# Altium PCB 1.PcbDoc (part 2 of 2)
Units mil, origin at the board's own origin, x right, y up, seen from the top; angles counter-clockwise.
Board outline 7086.61 x 1988.19 mil, 2 copper layers (Top Layer, Bottom Layer); 115 components, 0 nets, 642 pads, 224 vias.
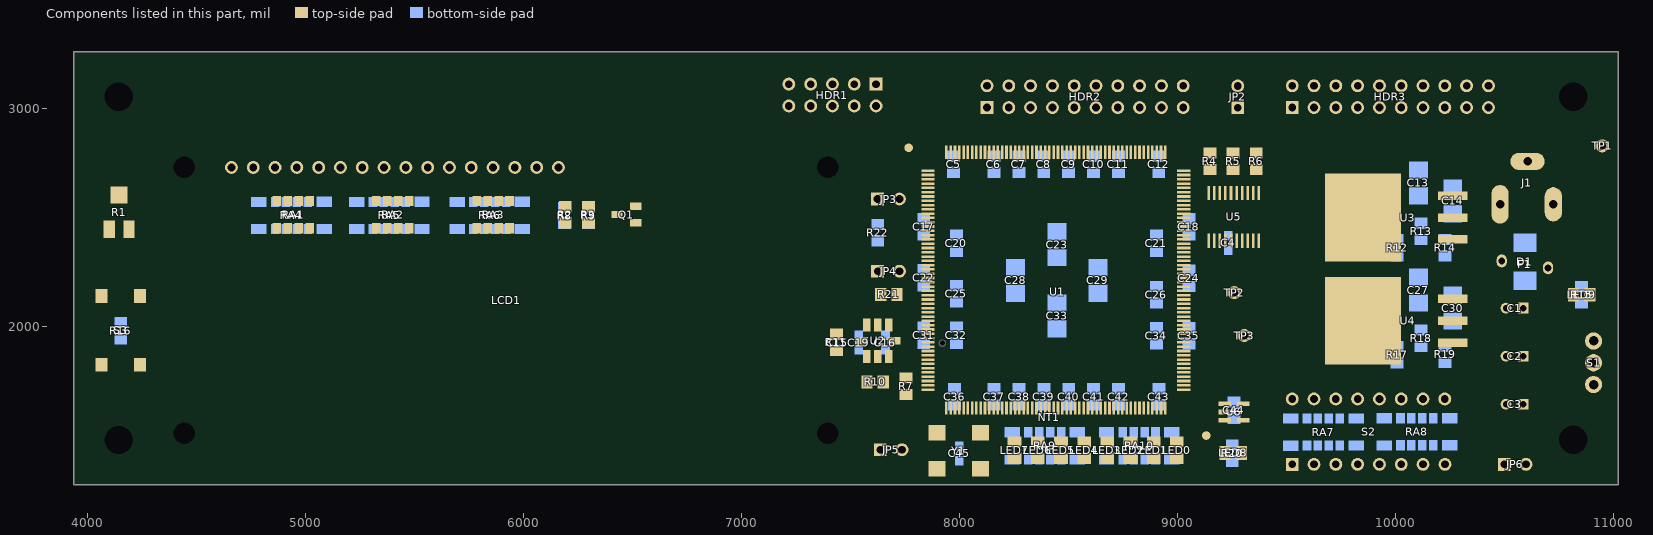
[diagram p2: the components of this part, seen from the top]

## Via types
v1: diameter 35.43, hole 23.62, Top Layer to Bottom Layer, tented both sides, 166 vias
v2: diameter 59.06, hole 31.5, Top Layer to Bottom Layer, tented both sides, 26 vias
v3: diameter 47.24, hole 31.5, Top Layer to Bottom Layer, 18 vias
v4: diameter 47.24, hole 31.5, Top Layer to Bottom Layer, tented both sides, 11 vias
v5: diameter 19.68, hole 11.81, Top Layer to Bottom Layer, tented both sides, 2 vias
v6: diameter 35.43, hole 23.62, Top Layer to Bottom Layer, 1 vias

## Nets (pads, with @x,y where several pads share a name; then routed paths per layer and width w, separated by ;. In a path a pad name is that pad's centre, name@x,y a point inside that pad or via, vN(x,y) a via of type N, cw(c..) or ccw(c..) an arc to the next point about the centre after c; other vN are vias at no path point) (continued)
copper on no net: | length 199543.1
  Top Layer w7.87: v1(4066.93,2208.78) 4128.54,2270.39 5685.04,2270.39 5732.87,2222.56 6655.51,2222.56 6759.84,2326.89 7736.22,2326.89 7799.21,2263.9 7799.21,2209.76 7807.09,2201.89 7856.3,2201.89 ; 4919.88,2449.93 4919.88,2363.69 4949.79,2333.78 5271.65,2333.78 5318.9,2286.54 5692.91,2286.54 5740.16,2239.29 6649.88,2239.29 6753.22,2342.64 7745.08,2342.64 7807.09,2280.63 7856.3,2280.63 ; 4969.88,2449.93 4969.88,2372.76 4993.11,2349.53 5279.53,2349.53 5326.77,2302.28 5700.79,2302.28 5748.03,2255.04 6643.35,2255.04 6746.7,2358.39 7751.72,2358.39 7809.79,2300.32 7856.3,2300.32 ; 5019.88,2449.93 5019.88,2377.87 5032.48,2365.28 5287.4,2365.28 5334.65,2318.03 5708.66,2318.03 5755.91,2270.79 6636.83,2270.79 6740.18,2374.13 7758.24,2374.13 7812.37,2320 7856.3,2320 ; 5326.57,2449.93 5326.57,2366.26 5359.06,2333.78 5720.47,2333.78 5767.72,2286.54 6630.31,2286.54 6733.65,2389.88 7764.76,2389.88 7814.96,2339.68 7856.3,2339.68 ; 5376.57,2449.93 5376.57,2371.57 5398.62,2349.53 5728.35,2349.53 5775.59,2302.28 6623.78,2302.28 6727.13,2405.63 7771.29,2405.63 7797.86,2379.06 7856.3,2379.06 ; 5426.57,2449.93 5426.57,2380.63 5441.93,2365.28 5736.22,2365.28 5783.46,2318.03 6617.26,2318.03 6720.61,2421.38 7777.81,2421.38 7800.45,2398.74 7856.3,2398.74 ; 5476.57,2449.93 5476.57,2389.69 5485.24,2381.02 5744.09,2381.02 5791.34,2333.78 6610.74,2333.78 6714.08,2437.13 7784.33,2437.13 7803.03,2418.43 7856.3,2418.43 ; 5787.2,2449.93 5787.2,2378.27 5815.94,2349.53 6604.21,2349.53 6707.56,2452.87 7790.86,2452.87 7805.62,2438.11 7856.3,2438.11 ; 5837.2,2449.93 5837.2,2383.39 5855.31,2365.28 6597.69,2365.28 6701.04,2468.62 7763.66,2468.62 7811.89,2516.85 7856.3,2516.85 ; 5887.2,2449.93 5887.2,2392.44 5898.62,2381.02 6591.17,2381.02 6694.52,2484.37 7755.91,2484.37 7808.07,2536.54 7856.3,2536.54 ; 5937.2,2449.93 5937.2,2406.42 5946.85,2396.77 6584.65,2396.77 6687.99,2500.12 7748.03,2500.12 7804.13,2556.22 7856.3,2556.22 ; 6192.91,2549.33 6156.5,2549.33 6145.67,2538.5 6145.67,2442.05 6175.2,2412.52 6578.12,2412.52 6681.47,2515.87 7740.16,2515.87 7800.2,2575.91 7856.3,2575.91 ; 7318.11,3010.35 7375.6,2952.87 7416.34,2952.87 7773.62,2595.59 7856.3,2595.59 ; 7318.11,3110.35 7368.11,3060.35 7368.11,2999.13 7398.63,2968.62 7424.22,2968.62 7777.56,2615.28 7856.3,2615.28 ; 7418.11,3010.35 7418.11,2997.36 7780.51,2634.96 7856.3,2634.96 ; 7418.11,3110.35 7468.5,3059.96 7468.5,2970.59 7784.45,2654.65 7856.3,2654.65 ; 7436.22,1964.68 7476.38,1964.68 7507.87,1933.19 7551.18,1933.19 ; 7518.11,3010.35 7518.11,2945 7769.09,2694.02 7856.3,2694.02 ; v1(7555.12,2059.17) 7566.93,2059.17 7575.98,2050.12 7575.98,2006.02 ; 7576.77,1744.21 7576.77,1789.49 7594.49,1807.2 7609.45,1807.2 7625.98,1823.74 7625.98,1860.35 ; 7625.72,2252.48 7625.72,2159.17 7639.56,2145.34 ; 7625.89,2006.52 7626.08,2006.71 v1(7626.08,2058.68) ; 7629.66,2189.09 7744.09,2189.09 7765.08,2168.11 7765.08,2152.36 7794.29,2123.15 7856.3,2123.15 ; v5(7637.8,1578.86) 7712.6,1578.86 7755.46,1621.72 7755.46,1687.33 7794.5,1687.33 7816.93,1709.76 7856.3,1709.76 ; 7675.98,2006.02 7675.98,2042.24 7675.98,2054.06 7681.1,2059.17 v1(7704.72,2059.17) ; v1(7685.04,2295.39) 7744.09,2295.39 7780.82,2258.66 7780.82,2160.24 7798.23,2142.83 7856.3,2142.83 ; 7700.79,1933.19 7736.22,1933.19 7744.09,1941.06 7744.09,1964.68 7779.51,2000.1 7779.51,2109.81 7743.99,2145.34 7714.36,2145.34 ; 7960.63,2798.35 v1(7960.63,3000.12) ; 8127.56,3102.48 8183.07,3046.97 8183.07,2985.35 8212.28,2956.15 8251.62,2956.15 8275.59,2932.18 8275.59,2798.35 ; 8227.56,3002.48 8305.12,2924.92 v1(8305.12,2882.99) 8314.96,2871.18 8314.96,2798.35 ; 8227.56,3102.48 8277.56,3052.48 8277.56,2976.67 8334.65,2919.58 8334.65,2798.35 ; 8253.94,1394.8 8253.94,1344.61 8263.78,1334.76 v1(8287.4,1334.76) ; 8253.94,1469.61 8253.94,1522.76 8285.43,1554.25 8541.71,1554.25 8562.37,1574.92 8758.86,1574.92 8767.72,1583.78 8767.72,1625.12 ; 8327.56,3002.48 8327.56,2948.94 8364.17,2912.32 v1(8364.17,2881.02) 8354.33,2871.18 8354.33,2798.35 ; 8327.56,3102.48 8369.09,3060.95 8369.09,2974.89 8403.91,2940.08 8445.42,2940.08 8472.44,2913.06 8472.44,2798.35 ; 8360.24,1394.8 8360.24,1336.73 v1(8362.2,1334.76) ; 8360.24,1469.61 8360.24,1510.94 8387.8,1538.5 8548.23,1538.5 8568.9,1559.17 8775.59,1559.17 8787.4,1570.98 8787.4,1625.12 ; 8427.56,3002.48 8511.81,2918.23 8511.81,2798.35 ; 8427.56,3102.48 8384.84,3059.76 8384.84,2981.42 8410.43,2955.83 8451.94,2955.83 8492.13,2915.64 8492.13,2798.35 ; v1(8437.01,1334.76) 8448.82,1334.76 8466.54,1352.48 8466.54,1394.8 ; 8466.54,1469.61 8466.54,1509.96 8478.35,1521.77 8557.09,1521.77 8578.74,1543.42 8800.2,1543.42 8807.09,1550.31 8807.09,1625.12 ; 8527.56,3002.48 8570.87,2959.17 8570.87,2798.35 ; 8527.56,3102.48 8476.38,3051.3 8476.38,2980.43 8531.5,2925.32 8531.5,2798.35 ; v1(8545.47,1334.76) 8561.02,1334.76 8572.83,1346.57 8572.83,1394.8 ; 8572.83,1469.61 8572.83,1507.99 8592.52,1527.68 8814.96,1527.68 8826.77,1539.49 8826.77,1625.12 ; 8590.55,2798.35 8590.55,2965.67 8576.77,2979.45 8576.77,3051.69 8627.56,3102.48 ; 8610.24,2798.35 8610.24,2940.08 8627.56,2957.4 8627.56,3002.48 ; 8629.92,2798.35 8629.92,2919.41 8675.2,2964.69 8675.2,3050.12 8727.56,3102.48 ; 8679.13,1394.8 8679.13,1344.61 8688.98,1334.76 v1(8716.54,1334.76) ; 8679.13,1469.61 8679.13,1503.07 8687.99,1511.93 8822.83,1511.93 8846.46,1535.55 8846.46,1625.12 ; 8708.66,2798.35 8708.66,2890.75 8727.56,2909.65 8727.56,3002.48 ; 8728.35,2798.35 8728.35,2888.16 8770.67,2930.49 8770.67,3045.59 8827.56,3102.48 ; 8748.03,2798.35 8748.03,2885.58 8827.56,2965.11 8827.56,3002.48 ; 8767.72,2798.35 8767.72,2882.99 8875.98,2991.26 8875.98,3050.91 8927.56,3102.48 ; 8785.43,1394.8 8785.43,1344.61 v1(8795.28,1334.76) ; 8785.43,1469.61 8825.79,1469.61 8838.58,1482.4 8838.58,1499.13 8866.14,1526.69 8866.14,1625.12 ; 8787.4,2798.35 8787.4,2880.04 8909.84,3002.48 8927.56,3002.48 ; 8807.09,2798.35 8807.09,2877.45 8889.8,2960.17 8947.25,2960.17 8989.57,3002.48 9027.56,3002.48 ; 8826.77,2798.35 8826.77,2874.87 8896.32,2944.42 9332.83,2944.42 9464.64,3076.23 9490.89,3102.48 9527.56,3102.48 ; 8846.46,2798.35 8846.46,2872.28 8902.85,2928.67 9339.35,2928.67 9470.84,3060.16 9585.24,3060.16 9627.56,3102.48 ; v1(8866.14,1334.76) 8881.89,1334.76 8891.73,1344.61 8891.73,1394.8 ; 8866.14,2798.35 8866.14,2869.7 8909.37,2912.92 9345.88,2912.92 9477.36,3044.41 9669.49,3044.41 9727.56,3102.48 ; 8885.83,1625.12 8885.83,1621.18 8885.83,1475.51 8891.73,1469.61 ; 8885.83,2798.35 8885.83,2867.11 8915.89,2897.18 9352.4,2897.18 9415.3,2960.08 9564.29,2960.08 9606.69,3002.48 9627.56,3002.48 ; 8905.51,1625.12 8905.51,1540.47 8949.8,1496.18 8949.8,1479.45 8959.65,1469.61 8998.03,1469.61 ; 8905.51,2798.35 8905.51,2844.61 v1(8927.17,2866.26) ; 8944.88,1625.12 8944.88,1586.73 8951.77,1579.84 9053.15,1579.84 v1(9079.72,1606.42) 9217.52,1606.42 ; 8944.88,2798.35 8944.88,2840.67 8983.27,2879.06 9376.97,2879.06 v1(9424.21,2926.3) ; v1(8948.82,1334.76) 8978.35,1334.76 8998.03,1354.45 8998.03,1394.8 ; 9029.53,1729.45 9083.66,1729.45 9103.35,1709.76 9150.59,1709.76 v1(9165.35,1724.53) ; 9029.53,1749.13 9114.17,1749.13 v1(9124.02,1739.29) ; 9029.53,1768.82 9378.94,1768.82 9481.5,1666.26 9527.56,1666.26 ; 9029.53,1788.5 9381.89,1788.5 9461.61,1708.78 9585.04,1708.78 9627.56,1666.26 ; 9029.53,1808.19 9384.84,1808.19 9468.5,1724.53 9669.29,1724.53 9727.56,1666.26 ; 9029.53,1827.87 9387.43,1827.87 9475.03,1740.28 9753.54,1740.28 9827.56,1666.26 ; 9029.53,1847.56 9390.01,1847.56 9427.04,1810.54 9481.55,1756.02 9837.8,1756.02 9927.56,1666.26 9926.38,1666.26 ; 9029.53,1867.24 9392.6,1867.24 9429.38,1830.47 9486.1,1773.74 9920.08,1773.74 10027.56,1666.26 ; 9029.53,1886.93 9395.19,1886.93 9492.63,1789.49 10004.33,1789.49 10127.56,1666.26 ; 9029.53,1906.61 9397.77,1906.61 9436.82,1867.57 9497.18,1807.2 10086.61,1807.2 10227.56,1666.26 ; 9029.53,2005.04 9416.34,2005.04 9625,2213.7 9625,2708.99 9662.19,2746.18 9842.06,2746.18 9866.66,2770.79 10119.09,2770.79 10287.04,2938.73 10363.81,2938.73 10427.56,3002.48 ; 9029.53,2024.72 9413.75,2024.72 9608.27,2219.24 9608.27,2714.53 9655.67,2761.93 9835.53,2761.93 9860.14,2786.54 10111.61,2786.54 10327.56,3002.48 ; 9029.53,2044.41 9411.17,2044.41 9592.52,2225.76 9592.52,2721.06 9649.14,2777.68 9829.01,2777.68 9854.6,2803.27 10106.08,2803.27 10279.53,2976.72 10279.53,3054.45 10327.56,3102.48 ; 9029.53,2064.09 9406.5,2064.09 9576.77,2234.37 9576.77,2727.58 9642.62,2793.43 9822.49,2793.43 9848.08,2819.02 10099.55,2819.02 10227.56,2947.02 10227.56,3002.48 ; 9029.53,2103.46 9097.44,2103.46 9121.06,2079.84 9398.62,2079.84 9561.02,2242.24 9561.02,2637.91 9561.02,2734.1 9636.1,2809.17 9815.96,2809.17 9841.55,2834.76 10093.03,2834.76 10177.17,2918.9 10177.17,3052.09 10227.56,3102.48 ; 9029.53,2123.15 9101.38,2123.15 9128.94,2095.59 9390.75,2095.59 9545.28,2250.12 9545.28,2656.61 9545.28,2740.62 9629.57,2824.92 9809.44,2824.92 9835.03,2850.51 10086.51,2850.51 10127.56,2891.56 10127.56,3002.48 ; 9029.53,2142.83 9105.32,2142.83 9136.81,2111.34 9382.87,2111.34 9529.53,2257.99 9529.53,2657.6 9529.53,2747.15 9623.05,2840.67 9802.92,2840.67 9828.51,2866.26 10052.17,2866.26 10075.79,2889.88 10075.79,3050.71 10127.56,3102.48 ; 9029.53,2182.2 9091.54,2182.2 9106.48,2197.15 9445.07,2197.15 9513.78,2265.87 9513.78,2665.47 9513.78,2753.67 9616.53,2856.42 9796.39,2856.42 9822.97,2882.99 9990.16,2882.99 10027.56,2920.39 10027.56,3002.48 ; 9029.53,2241.26 9084.65,2241.26 9109.25,2216.65 9440.94,2216.65 9498.03,2273.74 9498.03,2760.19 9610,2872.17 9789.87,2872.17 9816.45,2898.74 9947.83,2898.74 9977.36,2928.27 9977.36,3052.28 10027.56,3102.48 ; 9029.53,2260.94 9087.6,2260.94 9116.14,2232.4 9431.1,2232.4 9482.28,2283.58 9482.28,2642.83 9482.28,2766.72 9603.48,2887.91 9783.35,2887.91 9809.92,2914.49 9908.46,2914.49 9927.56,2933.58 9927.56,3002.48 ; 9029.53,2280.63 9090.18,2280.63 9122.66,2248.15 9421.26,2248.15 9466.54,2293.43 9466.54,2773.24 9596.96,2903.66 9776.83,2903.66 9803.4,2930.24 9848.43,2930.24 9878.94,2960.75 9878.94,3053.86 9927.56,3102.48 ; 9029.53,2300.32 9093.87,2300.32 9130.29,2263.9 9411.42,2263.9 9450.79,2303.27 9450.79,2779.76 9590.44,2919.41 9770.3,2919.41 9796.26,2945.37 9796.26,2945.98 9813.98,2945.98 9827.56,2959.57 9827.56,3002.48 ; 9029.53,2320 9096.46,2320 9136.81,2279.65 9401.57,2279.65 9435.04,2313.11 9435.04,2786.29 9583.91,2935.16 9763.78,2935.16 9780.51,2951.89 9780.51,3055.43 9827.56,3102.48 ; 9029.53,2359.37 9079.36,2359.37 9140.23,2298.5 9394.84,2298.5 9419.29,2322.95 9419.29,2792.81 9577.39,2950.91 9675.98,2950.91 9727.56,3002.48 ; 9029.53,2654.65 9104.33,2654.65 9110.24,2660.55 9367.13,2660.55 9374.02,2653.66 9374.02,2610.35 ; 9029.53,2694.02 9075.79,2694.02 9092.52,2677.28 9391.73,2677.28 9401.57,2667.44 9401.57,2578.86 9378.94,2556.22 9329.72,2556.22 9322.83,2563.11 9322.83,2610.35 ; v1(9094.49,2719.61) 9149.61,2719.61 ; v1(9125.98,2550.32) 9143.7,2568.03 9143.7,2610.35 ; v1(9156.5,2516.85) 9156.5,2532.6 9194.88,2570.98 9194.88,2610.35 ; v1(9200.79,2534.57) 9220.47,2554.25 9220.47,2610.35 ; v1(9204.84,2719.8) 9255.91,2719.61 ; 9218.5,1418.43 9218.5,1465.67 9259.84,1507.01 9259.84,1563.11 9265.75,1569.02 9302.17,1569.02 ; 9246.06,2610.35 9246.06,2561.9 9297.01,2510.96 v1(9297.01,2501.77) ; 9271.65,2610.35 9271.65,2569.02 9333.9,2506.77 v1(9347.01,2506.77) ; 9293.31,1418.42 v1(9353.35,1418.42) ; 9297.24,2391.85 v1(9297.24,2454.84) ; 9297.24,2610.35 9297.24,2566.06 9323.82,2539.49 9374.29,2539.49 v1(9387.01,2526.77) ; v1(9311.03,2719.59) 9362.2,2719.61
  Top Layer w11.81: v1(4188.98,2378.07) 4190.94,2380.04 4190.94,2445 ; 4241.73,1822.56 v1(4241.73,1895.39) ; 4241.73,2137.91 v1(4241.73,2207.2) ; 6299.21,2549.33 6344.49,2549.33 6358.27,2563.11 6459.65,2563.11 6473.43,2549.33 6515.75,2549.33 v1(6586.61,2549.33) 7551.18,2549.33 v4(7551.18,2763.9) ; 7651.57,1744.21 7651.57,1799.33 7675.98,1799.33 7675.98,1860.35 ; 7737.8,1433.19 7753.54,1417.44 v1(7897.64,1417.44) ; 7755.46,1762.13 7810.04,1762.13 7810.04,1748.66 7922.24,1748.66 ; v1(7775.59,1953.86) 7775.59,1965.2 7856.21,1965.2 ; v1(7800.2,2723.54) 7800.2,2713.7 7856.3,2713.7 ; 7856.21,1984.88 7907.95,1984.88 v1@7934.06,1958.78 ; 7856.21,2004.57 7905.04,2004.57 v1(7922.24,2021.77) ; 7856.21,2102.99 v1@7922.24,2102.99 ; 7856.21,2181.73 v1@7922.24,2181.73 ; 7856.21,2221.1 7919.8,2221.1 v1(7924.21,2225.51) v1@7929.13,2225.51 ; 7856.21,2240.79 7893.17,2240.79 7925.2,2272.81 v1(7925.2,2283.58) 8349.41,2283.58 v4(8349.41,2315.08) ; 7856.21,2358.9 7925.2,2358.9 v1(7925.2,2343.62) ; 7856.21,2457.32 7895.16,2457.32 7925.2,2427.28 v1(7925.2,2403.66) ; 7856.21,2477.01 v1@7930.12,2477.01 ; 7856.21,2496.69 7901.57,2496.69 7901.57,2541.46 v1(7926.18,2541.46) ; 7856.3,1729.45 7922.24,1729.45 v1(7922.24,1776.69) ; v1(7897.64,1578.86) 7933.07,1578.86 7940.86,1586.65 7940.86,1624.65 ; 7940.86,2797.87 7940.86,2755.13 7989.17,2706.81 v1(8035.43,2706.81) ; 7960.54,1626.96 7960.54,1775.71 v1(7976.38,1775.71) ; v1(8000,1323.94) 8022.64,1346.57 8097.64,1346.57 ; v1(8094.49,1713.7) 8177.08,1713.7 8177.08,1624.65 ; 8097.64,1511.93 8181.1,1511.93 8242.13,1572.95 8462.6,1572.95 8472.35,1582.71 8472.35,1624.65 ; v1(8098.43,2731.42) 8157.39,2731.42 8157.39,2797.87 ; v1(8159.45,1766.85) 8196.76,1729.54 8196.76,1624.65 ; v1(8159.45,2657.6) 8177.08,2675.23 8177.08,2797.87 ; 8196.76,2797.87 8196.76,2729.54 v1(8273.62,2652.68) ; 8216.45,1624.65 8216.45,1711.65 v1(8273.62,1768.82) ; 8295.19,2797.87 8295.19,2732.4 v1(8329.72,2732.4) ; 8314.87,1624.65 8314.87,1705.83 v1(8330.71,1705.83) ; 8373.93,2797.87 8373.93,2666.54 v1(8387.8,2652.68) ; v1(8387.8,1768.82) 8393.61,1763 8393.61,1624.65 ; 8393.61,2797.87 8393.61,2852.48 ; 8393.7,2852.48 8452.76,2852.48 ; 8413.3,2797.87 8413.3,2710.83 8426.18,2697.95 8490.16,2697.95 8500.98,2687.13 v1(8500.98,2657.6) ; 8432.98,1624.65 8432.98,1665.56 8413.39,1685.16 8413.39,1720.59 8459.65,1766.85 v1(8501.97,1766.85) ; 8432.98,2797.87 8432.98,2735.29 v1(8446.85,2735.29) ; v1(8445.87,1705.83) v1@8452.76,1705.83 ; 8452.67,1624.65 8452.67,1669.32 ; 8452.67,2797.87 8452.67,2852.48 ; v1@8551.09,2732.4 8551.09,2797.87 ; v1(8559.06,1705.83) v1@8570.87,1705.83 ; 8570.78,1624.65 v1@8570.78,1705.83 ; v1(8616.14,1768.82) 8669.2,1715.76 8669.2,1624.65 ; v1(8616.14,2652.68) 8649.52,2686.06 8649.52,2797.87 ; 8669.2,2797.87 8669.2,2718.71 v1(8730.31,2657.6) ; 8688.89,1624.65 8688.89,1726.41 v1(8729.33,1766.85) ; 8688.89,2797.87 8688.89,2732.4 v1(8791.34,2732.4) ; 8708.57,1624.65 8708.57,1696.97 v1(8798.23,1696.97) ; v1(8848.43,1696.97) 8848.43,1671.38 8925.11,1671.38 8925.11,1624.65 ; v1(8854.33,2732.4) 8925.2,2732.4 ; v1(8903.54,2056.22) 8903.54,2083.31 9029.44,2083.31 ; v1(8915.35,2655.63) 8973.43,2713.7 9029.53,2713.7 ; 8925.11,2732.4 8925.11,2797.87 ; v1(8964.57,2454.84) 8964.57,2457.32 9029.44,2457.32 ; v1(8965.55,1897.76) 8977.04,1909.25 8977.04,1951.8 8990.44,1965.2 9029.44,1965.2 ; v1@8965.55,1984.88 9029.44,1984.88 ; v1(8965.55,2146.77) 8980.83,2162.05 9029.44,2162.05 ; v1(8965.55,2195.98) v1@8971.46,2201.89 ; v1(8965.55,2245.2) 8989.65,2221.1 9029.44,2221.1 ; v6(8965.55,2339.21) 9029.44,2339.21 ; v1(8965.55,2399.72) 8980.31,2414.49 8980.31,2426.03 8991.93,2437.64 9029.44,2437.64 ; v1(8965.55,2500.12) 8988.66,2477.01 9029.44,2477.01 ; v1(8971.46,1748.15) 8971.46,1724.53 8986.69,1709.29 9029.44,1709.29 ; v1@8971.93,2201.42 9029.44,2201.42 ; 9027.56,3102.48 9277.56,3102.48 ; 9029.44,1945.51 v1@9122.05,1945.51 ; v1(9072.83,1325.91) 9082.68,1314.09 9422.24,1314.09 9474.41,1366.26 10600,1366.26 ; 9143.7,2391.85 9143.7,2477.48 ; 9143.7,2462.72 v1(9233.27,2462.72) ; v1(9149.59,1573.94) 9149.61,1569.02 9217.52,1569.02 ; 9149.61,2794.41 9149.61,2840.67 ; 9255.91,2794.41 9255.91,2840.67 ; 9302.17,1643.82 9410.43,1643.82 v1(9418.31,1651.69) ; 9322.83,2391.85 v1(9322.83,2331.81) 9366.14,2331.81 9374.02,2339.69 9374.02,2391.85 ; 9348.42,2331.81 9348.42,2391.85 ; v1(9361.22,1500.12) 9451.77,1590.67 v1(10413.39,1590.67) ; 9362.2,2794.41 9362.2,2849.53 9363.19,2850.51 ; v1(9394.69,1354.45) 9421.18,1380.94 9421.18,1411.84 9512.41,1503.07 v1(9595.87,1503.06) ; v3(9488.19,1882.01) v3(9606.3,1882.01) ; v3(9547.24,1862.32) v3@9547.24,1882.01 ; v1(10212.6,2748.15) 10212.6,2787.52 10495.08,2787.52 10495.08,2756.02 10566.93,2756.02 10566.93,2748.15 ; v3(10251.97,2846.57) v3(10429.13,2846.57) ; v1(10307.09,1862.32) 10507.87,1862.32 ; v1(10338.58,2224.53) 10419.29,2143.82 10816.93,2143.82 10726.38,2143.82 ; 10507.87,2098.54 10507.87,2143.82 ; 10566.93,2817.23 10566.93,2681.22 10645.67,2681.22 10645.67,2817.23 ; 10606.3,2681.22 10606.3,2560.16 10649.61,2560.16 ; 10791.34,2519.8 10649.61,2519.8 10649.61,2598.54 10791.34,2598.54
  Top Layer w19.68: 4064.96,1822.56 4064.96,1891.85 v1(4066.93,1893.82) ; 4064.96,2137.91 v1@4064.96,2206.81 ; 4145.67,2602.48 4255.91,2602.48 4299.21,2559.17 4728.87,2559.17 4861.42,2691.72 4861.42,2728.46 ; v1(4208.66,2017.83) 4352.36,2017.83 4480.31,1889.88 v1(7291.32,1889.88) 7436.22,1889.88 ; 4919.88,2573.93 4919.88,2641.46 4961.42,2682.99 4961.42,2728.46 ; 4969.88,2573.93 4969.88,2636.93 5061.42,2728.46 ; 5019.88,2573.93 5019.88,2642.05 5059.06,2681.22 5114.17,2681.22 5161.42,2728.46 ; 5261.42,2728.46 5326.57,2663.31 5326.57,2573.93 ; 5361.42,2728.46 5361.42,2657.6 5376.57,2642.44 5376.57,2573.93 ; 5426.57,2573.93 5426.57,2642.83 5461.42,2677.68 5461.42,2728.46 ; 5476.57,2573.93 5476.57,2643.62 5561.42,2728.46 ; 5661.42,2728.46 5677.17,2728.46 5720.34,2685.29 5740.03,2685.29 5787.2,2638.11 5787.2,2573.93 ; 5761.42,2728.46 5837.2,2652.68 5837.2,2573.93 ; 5861.42,2728.46 5887.2,2702.68 5887.2,2573.93 ; 5937.2,2573.93 5937.2,2704.25 5961.42,2728.46 ; v1(6088.58,1695) v1(7469.49,1695) ; 6192.91,2474.53 6515.75,2474.53 ; v1(6370.08,2511.93) 6429.13,2511.93 ; 7897.64,1334.76 v1(7897.64,1578.86) ; v1(7924.21,2225.51) v1(8139.76,2225.51) ; v1(7930.12,2477.48) 7979.33,2428.27 v1(8139.76,2428.27) ; v1@7934.06,1958.78 v1(8139.76,1958.78) ; v1(8035.43,2706.81) 8084.65,2657.6 v1(8159.45,2657.6) v1(8159.45,2527.68) ; v1(8046.26,1694.02) 8046.26,1769.8 v1(8173.23,1896.77) ; v1(8159.45,1766.85) 8245.08,1852.48 v1(8245.08,1896.77) ; v1(8500.98,2527.68) v1(8500.98,2657.6) ; v1(8501.97,1766.85) v1(8501.97,1896.77) ; v1(8636.81,1896.77) 8636.81,1859.37 v1(8729.33,1766.85) ; v1(8673.23,2527.68) 8673.23,2600.51 v1(8730.31,2657.6) ; v1(8746.06,1911.54) 8808.07,1911.54 v1(8971.46,1748.15) ; v1(8746.06,1983.39) 8879.92,1983.39 v1(8965.55,1897.76) ; v1(8746.06,2195.98) v1(8965.55,2195.98) ; v1(8746.06,2454.84) v1(8964.57,2454.84) ; 8827.76,2527.68 8827.76,2568.03 v1(8915.35,2655.63) ; v1(9106.3,2847.56) 9116.14,2840.67 9352.36,2840.67 ; v1(9595.87,1503.06) v1@10175,1503.06 ; v1@10170.08,2398.54 10263.78,2398.54 ; v1(10171.26,1907.6) 10188.98,1925.32 10263.78,1925.32 ; v1(10173.23,1500.12) 10177.17,1504.06 v1(10452.76,1504.06) ; v1(10374.02,1712.72) 10562.99,1712.72 10586.61,1689.09 10586.61,1641.85 ; v1(10452.76,1945) 10566.93,1945 10586.61,1925.32 10586.61,1862.32 ; v1(10527.56,2842.64) 10531.5,2846.57 10937.01,2846.57 10956.69,2826.89 ; 10586.61,2019.8 10586.61,2082.8 ; v1(10854.33,2248.15) 10891.73,2210.75 10891.73,2143.82
  Top Layer w39.37: 4100.39,2445 4100.39,2509.96 4118.11,2527.68 4259.84,2527.68 4283.46,2504.06 v1(6088.58,2504.06) ; v1(4188.98,2378.07) v1(4622.05,2378.07) ; v2(4724.41,1507.99) v2(7086.61,1507.99) ; v2@4724.41,3198.94 v2@7217.52,3198.94 ; v2(7217.52,3193.03) v4(10472.44,3193.03) ; 7902.56,3193.23 7902.56,2744.21 v1(8003.94,2642.83) 8003.94,2476.5 8349.41,2476.5 v4(8349.41,2315.08) ; v1(8746.06,2527.68) v1(8906.5,2527.68) ; v1(8820.87,1829.84) 8824.8,1821.97 8980.54,1666.23 9126.75,1666.23 v5(9136.81,1676.3) ; v1(9106.3,2847.56) v1(9421.26,2847.56) ; v1(10118.11,2036.54) 10129.33,2025.32 10352.76,2025.32 v1(10374.02,2004.06) ; v1(10165.35,2527.68) 10194.49,2498.54 10355.91,2498.54 10393.7,2460.75 10393.7,2252.09 v1(10439.96,2205.83) ; v1(10173.23,2125.12) 10350.39,2126.1 10413.39,2063.11 v1(10413.39,2040.47) 10434.06,2019.8 v1(10814.96,2019.8) 10814.96,1854.45 10837.01,1832.4 10909.45,1832.4 ; v1(10177.17,2598.54) v1(10387.8,2598.54) ; 10700.79,2267.83 10751.97,2319.01 10893.7,2319.02 v1(10937.01,2275.71)
  Top Layer w47.24: v4(8064.96,2342.64) v4(8257.87,2342.64) ; v4(8635.83,2342.64) v4(8820.87,2342.64)
  Bottom Layer w7.87: 7440.94,1958.78 7471.65,1958.78 v1(7492.13,1948.94) ; 7518.11,3010.35 7474.41,3054.06 7474.41,3132.01 7535.63,3193.23 9098.23,3193.23 9224.41,3067.05 9224.41,2941.06 9402.56,2762.91 9402.56,2587.32 9347.01,2531.77 v1(9347.01,2506.77) ; 7518.11,3110.35 7518.11,3140.28 7555.12,3177.28 9091.9,3177.28 9208.66,3060.52 9208.66,2934.17 ; 7539.37,1958.78 7539.37,1995.85 7555.12,2011.6 v1(7555.12,2059.17) ; 7618.11,3010.35 7566.91,3061.55 7566.91,3145.77 7582.68,3161.54 7681.1,3161.54 7914.37,2928.27 9192.3,2928.27 9241.04,2879.52 9371.06,2749.5 9371.06,2620.83 9267.33,2517.09 9267.33,2484.76 v1(9297.24,2454.84) ; 7618.11,3110.35 7704.72,3110.35 7902.56,2912.52 8880.91,2912.52 v1(8927.17,2866.26) ; 7625.72,2583.19 7625.72,2467.57 7626.43,2466.86 7671.06,2466.86 7685.04,2452.87 v1(7685.04,2295.39) ; v1(7626.08,2058.68) 7626.08,2030.84 7661.42,1995.51 7661.42,1958.78 ; 7626.43,2392.05 7573.02,2392.05 7551.18,2366.28 7551.18,2177.28 7594.49,2133.98 7658.04,2133.98 7704.72,2087.29 v1(7704.72,2059.17) v1@7692.91,2070.98 ; 7637.8,1433.19 v5(7637.8,1578.86) ; 7725.72,2252.48 7725.72,2517.18 7767.72,2559.17 7767.72,2606.42 7741.47,2632.66 7741.47,2756.72 7865.77,2881.02 8249.99,2881.02 8277.55,2853.46 8336.61,2853.46 v1(8364.17,2881.02) ; 7725.72,2583.19 7725.72,2763.24 7859.25,2896.77 8291.34,2896.77 v1(8305.12,2882.99) ; v1(7960.63,3000.12) 7960.63,3177.28 ; v1(8287.4,1334.76) 8307.09,1334.76 8316.73,1344.41 8316.73,1389.89 ; v1(8362.2,1334.76) 8366.73,1339.29 8366.73,1389.89 ; 8416.73,1389.89 8416.73,1355.04 v1(8437.01,1334.76) ; 8466.73,1389.89 8466.73,1358.39 8490.35,1334.76 v1(8545.47,1334.76) ; v1(8716.54,1334.76) 8736.22,1334.76 8749.8,1348.35 8749.8,1389.89 ; v1(8795.28,1334.76) 8799.8,1339.29 8799.8,1389.89 ; 8849.8,1389.89 8849.8,1351.1 v1(8866.14,1334.76) ; 8899.8,1389.89 8899.8,1355.43 8920.47,1334.76 ; v1(9079.72,1606.42) 9079.72,1747.17 9151.57,1819.02 9151.57,2097.2 9140.75,2108.03 9140.75,2478.03 9125.98,2492.8 9125.98,2688.11 v1(9094.49,2719.61) ; v1(9124.02,1739.29) 9167.32,1782.6 9167.32,2103.73 9156.5,2114.55 9156.5,2671.45 v1(9204.84,2719.8) ; v1(9165.35,1724.53) 9165.35,1758.36 9183.07,1776.08 9183.07,2110.25 9172.24,2121.08 9172.24,2487.01 9200.79,2515.55 9200.79,2565.08 9311.03,2675.33 v1(9311.03,2719.59) ; 9208.66,2934.54 9217.52,2925.68 9217.52,2925.31 9386.81,2756.02 9386.81,2601.57 9297.01,2511.77 v1(9297.01,2501.77) ; 9251.97,1455.83 9315.95,1455.83 v1(9353.35,1418.42) ; v1(9387.01,2526.77) 9418.31,2558.07 9418.31,2770.39 9358.27,2830.43 9358.27,2887.91 9396.65,2926.3 v1(9424.21,2926.3) ; 8920.47,1334.76 v1(8948.82,1334.76) 8920.47,1334.76
  Bottom Layer w11.81: v1(4188.98,2378.07) 4241.73,2378.07 v1(4241.73,1895.39) ; 4622.05,2728.46 4661.42,2728.46 ; v2(4724.41,1507.99) 4724.41,2378.07 ; v2@4724.41,3198.94 4622.05,3198.94 v1(4622.05,2378.07) 5618.1,2378.07 v1(5618.1,2413.5) ; 5161.42,2378.07 v1(5161.42,2397.76) ; v2@6496.06,3212.7 6586.61,3212.7 v1(6586.61,2549.33) ; 7217.52,3110.94 v2@7217.52,3198.94 ; 7218.11,3010.35 7218.11,3110.35 ; v1(7291.32,1889.88) 7291.32,1816.06 7352.36,1755.04 7683.07,1755.04 7858.27,1578.86 8021.65,1578.86 8046.26,1603.46 v1(8046.26,1694.02) ; v1(7539.37,1799.32) 7539.37,1891.85 ; v4(7551.18,2763.9) 7551.18,2571.97 7374.02,2571.97 7374.02,1891.85 7661.42,1891.85 v1(7661.42,1799.33) v1@7662.5,1810.26 ; 7775.59,2103.46 v1(7922.24,2103.46) 7930.12,2111.34 7986.22,2111.34 ; 7775.59,2260.94 7836.61,2260.94 7925.2,2260.94 v1(7925.2,2283.58) ; 7775.59,2343.62 7986.22,2343.62 ; 7836.61,1997.17 7895.67,1997.17 v1(7922.24,1970.59) ; 7836.61,2186.14 7876.97,2186.14 7890.75,2199.92 7890.75,2215.67 7900.59,2225.51 v1(7924.21,2225.51) ; 7836.61,2418.43 7878.94,2418.43 7902.56,2442.05 7902.56,2449.92 v1(7930.12,2477.48) ; 7836.61,2541.46 v1(7926.18,2541.46) ; 7836.61,2704.84 7974.41,2704.84 ; v1(7922.24,2021.77) 7946.85,1997.17 7986.22,1997.17 ; v1(7922.24,2182.2) 7922.24,2186.14 7986.22,2186.14 ; v1(7925.2,2403.66) 7939.96,2418.43 7986.22,2418.43 ; 7974.41,2779.65 8022.64,2779.65 8035.43,2766.85 v1(8035.43,2706.81) ; 7978.35,1638.9 8046.26,1638.9 ; 7978.35,1713.7 7931.9,1713.7 7931.89,1767.05 v1(7922.24,1776.69) ; 7986.22,1922.36 7922.24,1922.36 ; v1(8000,1323.94) 8000,1383.98 8057.09,1383.98 8057.09,1442.05 9072.83,1442.05 v1(9072.83,1325.91) ; v1(8098.43,2731.42) 8098.43,2779.65 8159.45,2779.65 8159.45,2831.81 ; 8159.45,1601.5 8159.45,1638.9 ; 8159.45,1713.7 v1(8159.45,1766.85) ; v1(8159.45,2657.6) 8159.45,2704.84 ; 8257.87,2150.71 v4(8348.43,2150.71) 8348.43,2106.42 8541.34,2106.42 v4(8541.34,2150.71) 8635.83,2150.71 ; 8272.64,1601.5 8273.62,1602.48 8273.62,1638.9 8330.71,1638.9 v1(8330.71,1705.83) ; 8273.62,2831.81 8273.62,2779.65 8329.72,2779.65 v1(8329.72,2732.4) ; 8316.73,1513.89 8316.73,1601.3 ; v4(8349.41,2315.08) 8448.82,2315.08 ; 8366.73,1513.89 8366.73,1601.3 ; 8387.8,1601.5 8387.8,1638.9 ; 8387.8,2831.81 8387.8,2779.65 8446.85,2779.65 v1(8446.85,2735.29) ; 8416.73,1513.89 8416.73,1601.3 ; 8433.07,2831.81 v1(8433.07,2852.48) ; v1(8445.87,1705.83) 8445.87,1638.9 8501.97,1638.9 8501.97,1601.5 ; 8448.82,2106.42 8448.82,2315.08 ; 8466.73,1513.89 8466.73,1601.3 ; v1(8500.98,2657.6) 8501.97,2704.84 ; 8501.97,1713.7 v1(8501.97,1766.85) ; 8501.97,2779.65 8501.97,2831.81 ; v4(8543.31,2315.08) 8448.82,2315.08 ; v1(8559.06,1705.83) 8559.06,1638.9 8616.14,1638.9 8616.14,1601.5 ; v1(8560.04,2732.4) 8560.04,2779.65 8616.14,2779.65 8616.14,2831.81 ; v1(8729.33,1766.85) 8729.33,1714.68 8730.31,1713.7 ; 8730.31,1601.5 8730.31,1638.9 8798.23,1638.9 v1(8798.23,1696.97) ; v1(8730.31,2657.6) 8730.32,2704.84 ; 8749.8,1513.89 8749.8,1601.3 ; 8799.8,1513.89 8799.8,1601.3 ; v1(8848.43,1696.97) 8848.43,1638.9 8915.35,1638.9 8915.35,1601.5 ; 8849.8,1513.89 8849.8,1601.3 ; 8899.8,1513.89 8899.8,1601.3 ; 8903.54,1918.43 8941.79,1918.43 ; 8903.54,1993.23 8903.54,2107.4 ; v1(8903.54,2056.22) 9104.33,2056.22 ; 8903.54,2182.2 8917.32,2168.43 8943.9,2168.43 v1(8965.55,2146.77) ; 8903.54,2418.43 8943.9,2418.43 8962.6,2399.72 v1(8965.55,2399.72) ; 8903.82,2343.4 8947.73,2343.4 8951.92,2339.21 v6(8965.55,2339.21) ; 8915.35,1713.7 8959.65,1713.7 8971.46,1725.51 v1(8971.46,1748.15) ; v1(8915.35,2655.63) 8915.35,2713.7 ; 8915.35,2779.65 8854.33,2779.65 v1(8854.33,2732.4) v1(8791.34,2732.4) 8791.34,2779.65 8730.32,2779.65 8730.32,2831.81 7875.98,2831.81 7800.2,2756.02 v1(7800.2,2723.54) 7836.61,2723.54 7836.61,2493.23 7775.59,2493.23 7775.59,1922.36 7836.61,1922.36 7922.24,1922.36 ; 8941.37,1918.85 8945.27,1922.75 ; 8945.77,1922.26 8965.55,1942.05 v1(8965.55,1985.35) ; v1(8964.57,2454.84) 9000.98,2418.43 9053.15,2418.43 ; v1(8965.55,1897.76) 9003.94,1936.14 9003.94,1985.35 9011.81,1993.23 9053.15,1993.23 ; v1(8965.55,2195.98) 8979.33,2182.2 9053.15,2182.2 ; v1(8965.55,2245.2) 8977.36,2257.01 9053.15,2257.01 9104.33,2257.01 ; v6@8965.55,2339.68 9104.33,2339.68 ; v1(8965.55,2500.12) 8972.44,2493.23 9053.15,2493.23 9104.33,2493.23 9104.33,1967.64 9122.05,1949.92 9122.05,1853.46 9031.5,1853.46 9031.5,1563.11 9149.61,1563.11 v1(9149.59,1573.94) 9162.4,1576.89 9259.84,1576.89 ; 9031.5,1601.5 8094.49,1601.5 v1(8094.49,1713.7) 8094.49,1775.71 v1(7976.38,1775.71) v1(7922.24,1776.69) ; 9053.15,1918.43 9122.05,1918.43 ; v4(9196.83,3193.03) 9277.56,3193.03 9277.56,3002.48 ; 9233.27,2348.54 9306.1,2348.54 v1(9322.83,2331.81) ; 9233.27,2415.47 v1(9233.27,2462.72) ; 9251.97,1381.02 9308.07,1381.02 9334.63,1354.45 v1(9394.69,1354.45) 9418.31,1378.07 v1(9418.31,1651.69) 9259.84,1651.69 ; v3(9488.19,1882.01) v3(9488.19,2000.12) ; v3(9547.24,1862.32) v3(9547.24,2039.49) ; v3(9606.3,1882.01) 9606.3,2224.53 10106.3,2224.53 10263.78,2224.53 ; 10106.3,2716.65 10212.6,2716.65 v1(10212.6,2748.15) 10263.78,2748.15 10263.78,2633.98 10338.58,2633.98 ; 10228.35,1907.6 10307.09,1907.6 v1(10307.09,1862.32) ; 10228.35,2397.76 10338.58,2397.76 ; 10263.78,2141.85 10263.78,2224.53 ; 10336.61,2633.98 10338.58,2633.98 ; v3(10399.61,2787.52) 10429.13,2787.52 v3(10429.13,2846.57) ; 10427.56,3102.48 10427.17,3193.03 10566.93,3193.03 10566.93,2689.09 10645.67,2689.09 10645.67,2819.02 ; 10594.49,2207.88 10507.87,2207.8 10507.87,1425.32 10600,1425.32 10600,1366.26 ; 10791.34,2519.8 10657.48,2519.8 10657.48,2598.54 10791.34,2598.54 ; v1(10814.96,2019.8) 10854.33,2063.11 10854.33,2106.42 ; v1(7922.24,1776.69) 7922.24,1922.36 ; 10263.78,2224.53 v1(10338.58,2224.53) 10338.58,2633.98
  Bottom Layer w19.68: v1(4066.93,1893.82) v1(4066.93,2208.78) ; 4066.93,1943.03 4153.54,1943.03 ; 4153.54,2017.83 v1(4208.66,2017.83) ; 4862.01,2445.99 v1(4862.2,2504.06) 5012.2,2504.06 ; 4912.01,2445.99 4912.01,2503.86 ; 4912.01,2569.99 4912.01,2618.03 4961.42,2667.44 4961.42,2728.46 ; 4962.01,2445.99 4962.01,2503.86 ; 4962.01,2569.99 4962.01,2629.06 5061.42,2728.46 ; 5012.01,2445.99 5012.01,2503.86 ; 5012.01,2569.99 5012.01,2626.3 5062.79,2677.08 5110.04,2677.08 5161.42,2728.46 ; 5261.42,2728.46 5310.83,2679.06 5310.83,2569.99 ; 5310.83,2445.99 v1(5311.02,2504.06) 5461.02,2504.06 ; 5360.83,2445.99 5360.83,2503.86 ; 5360.83,2569.99 5360.83,2727.87 5361.42,2728.46 ; 5410.83,2445.99 5410.83,2503.86 ; 5410.83,2569.99 5410.83,2677.87 5461.42,2728.46 ; 5460.83,2445.99 5460.83,2503.86 ; 5460.83,2569.99 5460.83,2630.24 5500,2669.41 5547.24,2669.41 5561.42,2683.58 5561.42,2728.46 ; 5661.42,2728.46 5771.46,2618.43 5771.46,2569.99 ; 5761.42,2728.46 5821.46,2668.43 5821.46,2569.99 ; 5771.46,2445.99 v1(5771.65,2504.06) 5921.65,2504.06 ; 5821.46,2445.99 5821.46,2503.86 ; 5861.42,2728.46 5861.42,2675.51 5871.46,2665.47 5871.46,2569.99 ; 5871.46,2445.99 5871.46,2503.86 ; 5921.46,2445.99 5921.46,2503.86 ; 5921.46,2569.99 5921.46,2688.5 5961.42,2728.46 ; 6061.42,2728.46 6088.58,2701.3 v1(6088.58,1695) ; 6161.42,2728.46 6161.42,2626.1 6188.98,2598.54 6188.98,2545.39 6299.21,2545.39 ; 6188.98,2470.59 6356.3,2470.59 6370.08,2484.37 v1(6370.08,2511.93) ; v1(7469.49,1695) 7647.64,1695 7826.77,1515.87 8072.83,1514.88 8119.09,1468.62 9039.37,1468.62 9086.61,1515.87 9345.47,1515.87 v1(9361.22,1500.12) ; v1(7897.64,1417.44) 7931.1,1450.91 8000,1450.91 ; 7986.22,1997.17 8064.96,1997.17 ; 7986.22,2186.14 8064.96,2186.14 ; 7986.22,2418.43 8064.96,2418.43 ; 8273.62,1713.7 v1(8273.62,1768.82) 8273.62,1821.97 ; 8273.62,2602.48 v1(8273.62,2652.68) 8273.62,2704.84 ; 8387.8,1713.7 8387.8,1821.97 ; 8387.8,2602.48 8387.8,2704.84 ; 8616.14,1713.7 8616.14,1821.97 ; 8616.14,2602.48 8616.14,2704.84 ; 8820.87,1918.43 8903.54,1918.43 ; 8820.87,2182.2 8903.54,2182.2 ; 8820.87,2418.43 8903.54,2418.43 ; 9261.14,2153.65 9261.14,2270.12 v1(9322.83,2331.81) 9474.41,2482.4 9474.41,2847.56 v1(9421.26,2847.56) ; 9527.56,1666.26 9544.49,1666.26 9594.29,1616.46 9594.29,1577.07 9594.49,1576.87 9594.49,1611.53 ; 9594.49,1452.87 v1@9594.49,1501.69 ; 9627.56,1666.26 9644.49,1649.33 9644.49,1576.87 ; 9644.29,1581.8 9644.29,1649.53 ; 9644.49,1452.87 v1@9644.49,1501.69 ; 9694.49,1452.87 v1@9694.49,1501.69 ; 9694.49,1576.87 9694.49,1633.19 9727.56,1666.26 ; 9744.49,1452.87 v1@9744.49,1501.69 ; 9744.49,1576.87 9744.49,1611.73 9799.02,1666.26 9827.56,1666.26 ; 9927.56,1666.26 9972.8,1621.02 10013.62,1621.02 10023.62,1611.02 10023.62,1576.87 ; 10007.87,1832.8 10228.35,1832.8 ; 10007.87,1907.6 v1(10171.26,1907.6) ; 10007.87,2322.95 10228.35,2322.95 ; 10007.87,2397.76 10118.11,2397.76 v1(10169.29,2397.76) ; 10023.62,1452.87 v1@10023.62,1501.69 ; 10027.56,1666.26 10073.62,1620.2 10073.62,1576.87 ; 10073.62,1452.87 v1@10073.62,1501.69 ; 10118.11,2474.53 10118.11,2528.66 ; 10123.62,1452.87 v1@10123.62,1501.69 ; 10123.62,1576.87 10123.62,1662.32 10127.56,1666.26 ; 10173.62,1452.87 v1@10173.62,1501.69 ; 10173.62,1576.87 10173.62,1612.32 10227.56,1666.26 ; v1(10374.02,1712.72) v1(10374.02,2004.06) ; v1(10387.8,2598.54) 10387.8,2702.87 v1(10527.56,2842.64) ; v1(10413.39,1590.67) v1(10413.39,2040.47) ; v1(10439.96,2205.83) 10439.96,2070 10452.76,2057.2 v1(10452.76,1945) v1(10452.76,1504.06) ; 10854.33,2181.22 v1(10854.33,2248.15)
  Bottom Layer w39.37: v1(4688.98,2504.06) 4688.98,2656.02 4761.42,2728.46 ; 8257.87,2268.82 v4(8257.87,2342.64) ; 8635.83,2268.82 v4(8635.83,2342.64) ; v1(8906.5,2527.68) 9022.64,2643.82 9022.64,2763.9 v1(9106.3,2847.56) ; v5(9136.81,1676.3) 9184.06,1676.3 9298.23,1790.47 9755.91,1790.47 9999.02,2036.54 10250.99,2036.54 10263.78,2023.74 ; 9307.09,1790.47 9307.09,1956.81 ; v1(9421.26,2847.56) 9652.56,2847.56 9972.44,2527.68 10251.97,2527.68 10263.78,2515.87 ; 10106.3,2106.42 10173.23,2106.42 v1(10173.23,2125.12) ; 10106.3,2598.54 v1(10177.17,2598.54) ; 10118.11,1982.4 v1(10118.11,2036.54) ; v1(10387.8,2598.54) 10387.8,2066.06 v1(10413.39,2040.47) ; 10480.32,2608.39 10480.32,2309.17 10488.19,2299.33 ; 10594.49,2375.01 10682.09,2375.12 10700.79,2356.42 10700.79,2267.83 ; 10909.45,1732.4 10909.45,1832.4 ; 10909.45,1932.4 10909.45,1976.5 10937.01,2003.27 v1(10937.01,2275.71)
  Bottom Layer w59.06: 8448.82,1901.69 8448.82,1988.31 ; 8448.82,2433.19 8448.82,2527.68 ; 8448.82,2527.68 v1(8159.45,2527.68) 8139.76,2527.68 v1(8139.76,2225.51) v1(8139.76,1958.78) 8139.76,1900.71 8746.06,1900.71 v1(8746.06,2527.68) 8448.82,2527.68 ; 8064.96,1829.84 v4(8064.96,2342.64) 8064.96,2597.56 8616.14,2597.56 8820.87,2597.56 v1(8820.87,1829.84) 8064.96,1829.84
  other v1: 10023.23,1500.12 10073.23,1500.12 10123.23,1500.12 9645.87,1503.06 9695.87,1503.06 9745.87,1503.06 9122.05,1945.98 7902.56,2788.5
  other v2: 4921.26,1507.99 5118.11,1507.99 5314.96,1507.99 5511.81,1507.99 5708.66,1507.99 5905.51,1507.99 6102.36,1507.99 6299.21,1507.99 6496.06,1507.99 6692.91,1507.99 6889.76,1507.99 4724.41,3193.03 4921.26,3193.03 5118.11,3193.03 5314.96,3193.03 5708.66,3193.03 5905.51,3193.03 6102.36,3193.03 6299.21,3193.03 6496.06,3193.03 6692.91,3193.03 6889.76,3193.03 7086.61,3193.03
  other v3: 9547.24,1921.38 9488.19,1941.06 9606.3,1941.06 9547.24,1980.43 9606.3,2000.12 9606.3,2059.17 10281.5,2787.52 10340.55,2787.52 10311.02,2846.57 10370.08,2846.57

## Polygon pours and split planes (outlines as drawn)
no net on Bottom Layer "NONET_L02_P000" (solid, pour order 0): 3935,3260 3935.04,3260.04 11022.45,3260.04 11022.45,1277.45 11020,1275 3940,1275 3940,3260
no net on Top Layer "NONET_L01_P001" (solid, pour order 1): 3950,3250 11015,3250 11015,1280 3940,1280 3940,1325 3949.98,1334.98 3949.98,3249.94

## Keep-outs
Keep-Out Layer:
  circle w7.87: c4143.7,1478.46 r157.48
  circle w7.87: c10816.93,1479.45 r157.48
  circle w7.87: c4143.7,3053.27 r157.48
  circle w7.87: c10816.93,3053.27 r157.48
  lines w25: 3937.01,1271.77 3937.01,3259.96 11023.62,3259.96 11023.62,1271.77 3937.01,1271.77

## Silkscreen, mask and mechanical layers (free items; w line width, h text height)
Top Overlay:
  text "CONTRAST" at 4011.81,2319.02 h39.37
  text "PWR" at 10997.01,2081.77 h47.24 r90
  text "TEST/" at 4078.73,1724.53 h39.37
  text "RESET" at 4070.87,1657.59 h39.37
  text "7" at 8251.97,1527.68 h47.24
  text "6" at 8346.46,1527.68 h47.24
  text "5" at 8452.76,1527.68 h47.24
  text "4" at 8555.12,1527.68 h47.24
  text "3" at 8665.35,1527.68 h47.24
  text "2" at 8767.72,1527.68 h47.24
  text "1" at 8877.95,1527.68 h47.24
  text "0" at 8980.32,1527.68 h47.24
  text "DONE" at 9171.97,1309.01 h47.24
Mechanical 1:
  the board outline again, w7.87
Mechanical 3:
  lines w7.87: 3957.01,1291.77 3957.01,3241.77 11003.94,3241.26 11003.62,1291.77 3957.01,1291.77
Mechanical 15:
  lines w7.87: 3948.82,2874.13 11023.62,2874.13

## Text inside footprints (layer, text, board x,y; h text height)
C1: Top Overlay "+" at 10703.5,2112.68 h59.06 r180
C2: Top Overlay "+" at 10703.5,1892.2 h59.06 r180
C3: Top Overlay "+" at 10703.5,1671.73 h59.06 r180
HDR1: Top Overlay "2" at 7838.69,2984.52 h39.37; Top Overlay "1" at 7846.57,3090.82 h39.37; Top Overlay "9" at 7148.22,3090.5 h39.37; Top Overlay "10" at 7113.22,2990.5 h39.37
HDR2: Top Overlay "3" at 8247.12,2907.76 h39.37 r90; Top Overlay "4" at 8247.12,3172.76 h39.37 r90; Top Overlay "7" at 8447.12,2907.76 h39.37 r90; Top Overlay "8" at 8447.12,3172.76 h39.37 r90; Top Overlay "9" at 8547.12,2907.76 h39.37 r90; Top Overlay "10" at 8547.12,3172.76 h39.37 r90; Top Overlay "13" at 8747.12,2872.76 h39.37 r90; Top Overlay "14" at 8747.12,3172.76 h39.37 r90; Top Overlay "17" at 8947.12,2872.76 h39.37 r90; Top Overlay "18" at 8947.12,3172.76 h39.37 r90; Top Overlay "5" at 8347.12,2907.76 h39.37 r90; Top Overlay "11" at 8647.12,2887.76 h39.37 r90; Top Overlay "15" at 8847.12,2872.76 h39.37 r90; Top Overlay "6" at 8347.12,3172.76 h39.37 r90; Top Overlay "12" at 8647.12,3172.76 h39.37 r90; Top Overlay "16" at 8847.12,3172.76 h39.37 r90; Top Overlay "2" at 8147.12,3172.76 h39.37 r90; Top Overlay "1" at 8147.12,2917.76 h39.37 r90; Top Overlay "19" at 9047.12,2872.76 h39.37 r90; Top Overlay "20" at 9047.12,3172.76 h39.37 r90
HDR3: Top Overlay "20" at 10447.12,3172.76 h39.37 r90; Top Overlay "19" at 10447.12,2872.76 h39.37 r90; Top Overlay "1" at 9547.12,2917.76 h39.37 r90; Top Overlay "2" at 9547.12,3172.76 h39.37 r90; Top Overlay "16" at 10247.12,3172.76 h39.37 r90; Top Overlay "12" at 10047.12,3172.76 h39.37 r90; Top Overlay "6" at 9747.12,3172.76 h39.37 r90; Top Overlay "15" at 10247.12,2872.76 h39.37 r90; Top Overlay "11" at 10047.12,2887.76 h39.37 r90; Top Overlay "5" at 9747.12,2907.76 h39.37 r90; Top Overlay "18" at 10347.12,3172.76 h39.37 r90; Top Overlay "17" at 10347.12,2872.76 h39.37 r90; Top Overlay "14" at 10147.12,3172.76 h39.37 r90; Top Overlay "13" at 10147.12,2872.76 h39.37 r90; Top Overlay "10" at 9947.12,3172.76 h39.37 r90; Top Overlay "9" at 9947.12,2907.76 h39.37 r90; Top Overlay "8" at 9847.12,3172.76 h39.37 r90; Top Overlay "7" at 9847.12,2907.76 h39.37 r90; Top Overlay "4" at 9647.12,3172.76 h39.37 r90; Top Overlay "3" at 9647.12,2907.76 h39.37 r90
Logo5: Top Overlay "5V DC" at 10701.73,2784.13 h47.24
U3: Top Overlay "2" at 10368.24,2485.65 h31.5 r90; Top Overlay "3" at 10369.74,2586.51 h31.5 r90; Top Overlay "1" at 10368.76,2390.65 h31.5 r90
U4: Top Overlay "1" at 10368.76,1917.42 h31.5 r90; Top Overlay "3" at 10369.74,2113.28 h31.5 r90; Top Overlay "2" at 10368.24,2012.42 h31.5 r90